# Altium PCB efm32.PcbDoc
Units mil, origin at the board's own origin, x right, y up, seen from the top; angles counter-clockwise.
Board outline 1082.68 x 1574.8 mil, 2 copper layers (Top Layer, Bottom Layer); 36 components, 29 nets, 211 pads, 56 vias.
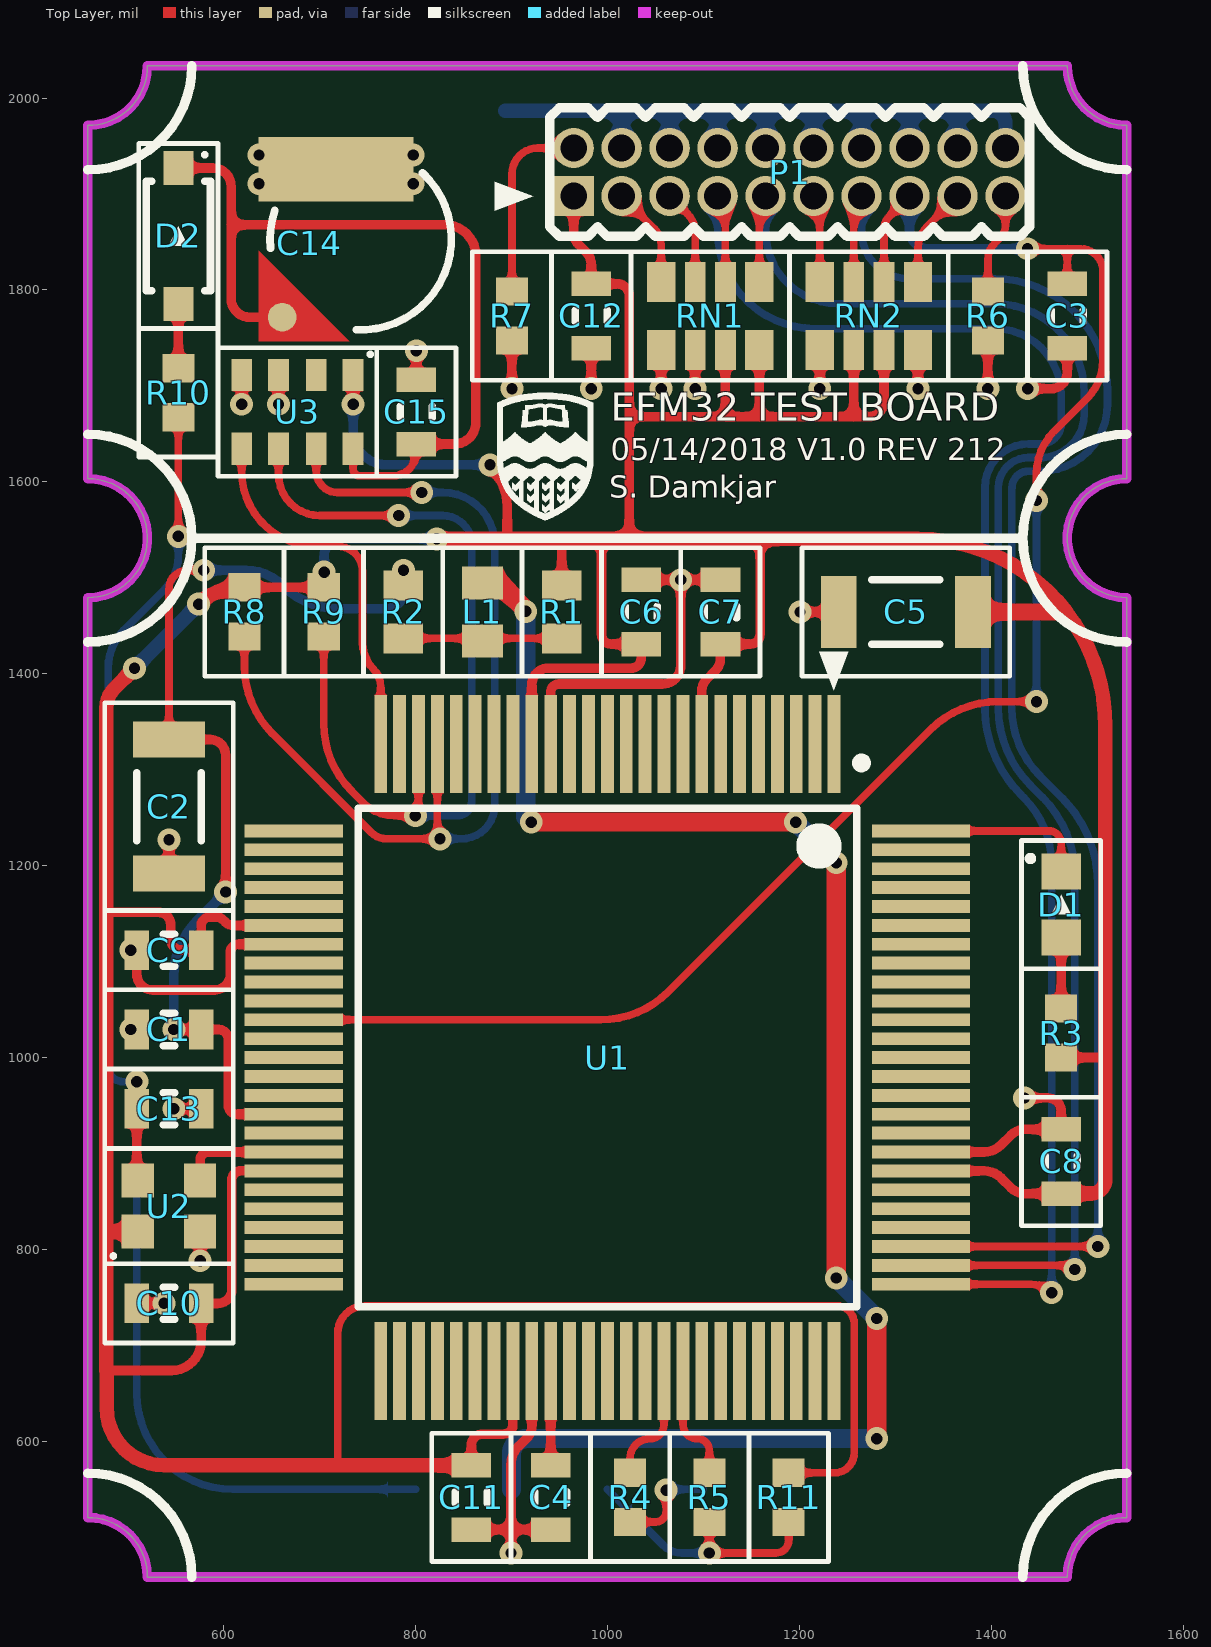
[diagram p0: Top Layer view]
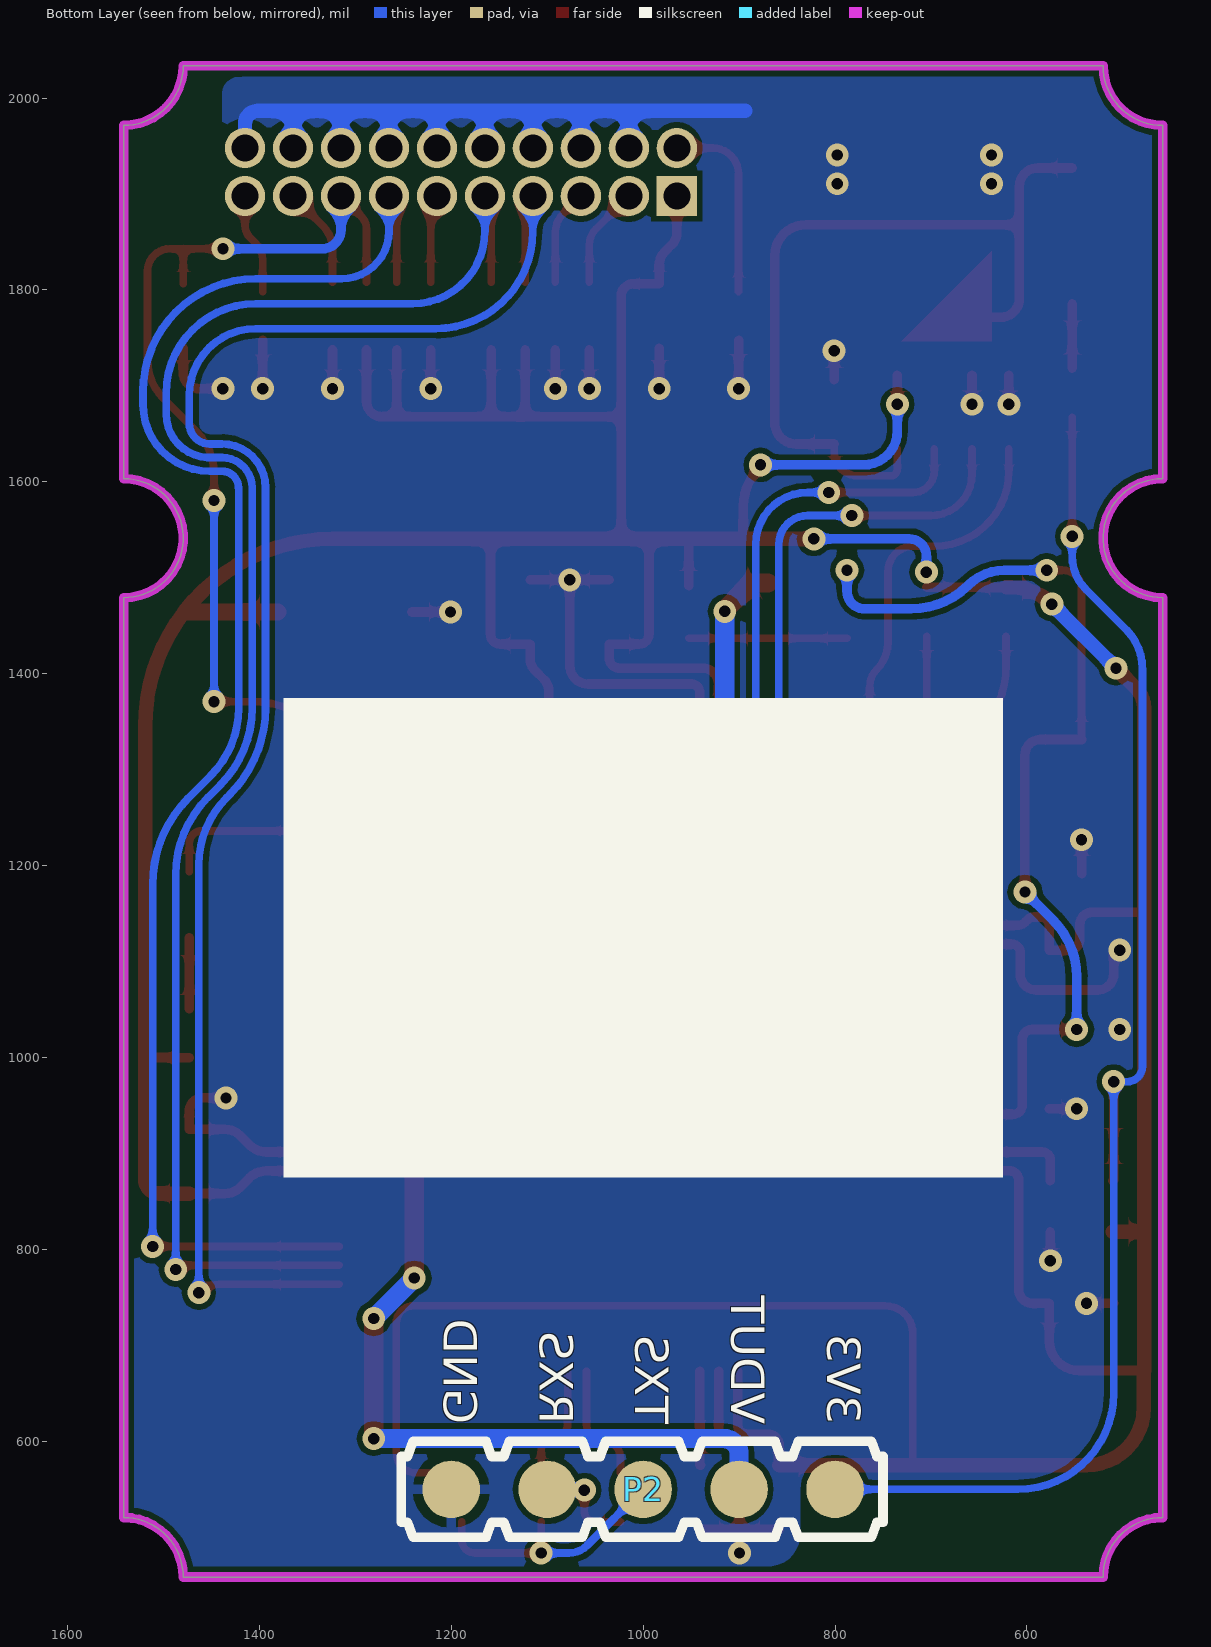
[diagram p1: Bottom Layer view, seen from below]

## Layer stack, top to bottom
Top Solder: solder mask 0.4, Solder Resist, Dk 3.5
Top Layer: signal copper 1.4
Dielectric 1: dielectric 12.6, FR-4, Dk 4.8
Bottom Layer: signal copper 1.4
Bottom Solder: solder mask 0.4, Solder Resist, Dk 3.5

## Board outline
458.66,520.67 458.66,1479.33 ccw(c458.66,1541.34) 458.66,1603.35 458.66,1971.46 ccw(c458.66,2033.46) 520.67,2033.46 1479.33,2033.46 ccw(c1541.34,2033.46) 1541.34,1971.46 1541.34,1603.35 ccw(c1541.34,1541.34) 1541.34,1479.33 1541.34,520.67 ccw(c1541.34,458.66) 1479.33,458.66 520.67,458.66 ccw(c458.66,458.66)

## Design rules (kind name [scope] priority, off if disabled: settings)
AcuteAngle [All] p1: minimum=6.00000000000000E+0001 checktracksonly=FALSE
BoardOutlineClearance [All] p1: gap=7.87 ignorepadtopadclearanceinfootprint=FALSE
Clearance [All] p1: gap=6 ignorepadtopadclearanceinfootprint=FALSE except(0: Arc-Hole Track-Hole SMDPad-Hole THPad-Hole Via-Hole Fill-Hole Poly-Hole Region-Hole Text-Hole)
Clearance ClearanceTop [OnLayer('Component Side')] p2 off: gap=4 ignorepadtopadclearanceinfootprint=FALSE except(0: Arc-Hole Track-Hole SMDPad-Hole THPad-Hole Via-Hole Fill-Hole Poly-Hole Region-Hole Text-Hole)
Clearance ClearanceTop_1 [OnLayer('Signal Layer 1')] p3 off: gap=4 ignorepadtopadclearanceinfootprint=FALSE except(0: Arc-Hole Track-Hole SMDPad-Hole THPad-Hole Via-Hole Fill-Hole Poly-Hole Region-Hole Text-Hole)
Clearance ClearanceTop_2 [OnLayer('Signal Layer 2')] p4 off: gap=4 ignorepadtopadclearanceinfootprint=FALSE except(0: Arc-Hole Track-Hole SMDPad-Hole THPad-Hole Via-Hole Fill-Hole Poly-Hole Region-Hole Text-Hole)
Clearance ClearanceBottom [OnLayer('Solder Side')] p5 off: gap=4 ignorepadtopadclearanceinfootprint=FALSE except(0: Arc-Hole Track-Hole SMDPad-Hole THPad-Hole Via-Hole Fill-Hole Poly-Hole Region-Hole Text-Hole)
Height HeightTop [OnLayer('Component Side')] p1: minheight=0 maxheight=1000 prefheight=157.48
Height HeightBottom [OnLayer('Solder Side')] p2: minheight=0 maxheight=157.48 prefheight=157.48
HoleSize [All] p1: absolutevalues=TRUE maxlimit=255.91 minlimit=7.87 maxpercent=80.000 minpercent=20.000
MinimumAnnularRing [All] p1: minimumring=4
MinimumSolderMaskSliver [All] p1: minsoldermaskwidth=3.94
PolygonConnect PolygonConnect_1 [IsVia] p1: connectstyle=Direct reliefconductorwidth=10 reliefentries=4 polygonreliefangle="90 Angle" airgapwidth=10
PolygonConnect [All] p2: connectstyle=Relief reliefconductorwidth=10 reliefentries=4 polygonreliefangle="90 Angle" airgapwidth=10
RoutingVias [All] p1: holewidth=8 width=20 viastyle="Through Hole" minholewidth=11.81 minwidth=23.81 maxholewidth=28 maxwidth=50
SMDEntry [All] p1: side=TRUE corner=FALSE anyangle=FALSE
SMDNeckDown [All] p1: percent=90.000
SMDToCorner [All] p1: distance=0
SMDToPlane [All] p1: distance=0
SilkToSilkClearance [All] p1: silktosilkclearance=6
SilkToSolderMaskClearance [IsPad] p1: minsilkscreentomaskgap=5.12 clearancetoexposedcopper=TRUE
SolderMaskExpansion [All] p1: expansion=0
UnConnectedPin [All] p1:
Width [All] p1: maxlimit=100 minlimit=6 preferedwidth=10 checkconnectedcopper=TRUE
25 further rules are at their usual default settings.

## Components (designator, comment, footprint, x,y, rotation, side; value= is the part's Value field where it differs from the comment)
C1 "Cap" TDK-CGA3E 543.1,1029.28 r0 top value=10000pF
C2 "Cap" TDK-CGA5L 543.1,1261.56 r90 top value=10µF
C3 "Cap" TDK-CGA3E 1479.28,1772.87 r270 top value=0.1µF
C4 "Cap" TDK-CGA3E 940.95,541.6 r90 top value=1µF
C5 "Cap" TDK-CGA5L 1311,1464.41 r0 top value=10µF
C6 "Cap" TDK-CGA3E 1035.16,1464.41 r270 top value=0.1µF
C7 "Cap" TDK-CGA3E 1117.84,1464.41 r270 top value=0.1µF
C8 "Cap" TDK-CGA3E 1472.93,891.73 r270 top value=0.1µF
C9 "Cap" TDK-CGA3E 543.1,1111.95 r0 top value=0.1µF
C10 "Cap" TDK-CGA3E 543.1,743.84 r0 top value=0.1µF
C11 "Cap" TDK-CGA3E 858.27,541.6 r90 top value=0.1µF
C12 "Cap" TDK-CGA3E 983.21,1772.87 r270 top value=0.1µF
C13 "Cap" TDK-CGA3E 543.1,946.6 r180 top value=10000pF
C14 "XH414HG" SKI-XH414HG-IV01E 742.93,1852.87 r180 top value=80mF
C15 "Cap" TDK-CGA3E 800.96,1672.87 r270 top value=0.1µF
D1 "LED" WL-150060XS75000 1472.93,1159.45 r90 top value=BLUE
D2 "1N4148W" DIOD-SOD123 552.93,1856.26 r90 top
L1 "Inductor" TDK-MPX1608 869.81,1464.41 r90 top value="1 kOhm @ 100MHz"
P1 "Header 10x2" SLN-GRPB102 964.9,1897.87 r0 top
P2 "319-10-105-30-054000" 319-10-105-30-054000 800,550 r0 bottom
R1 "Res3" VSH-0603MCT 952.48,1464.41 r90 top value=1
R2 "Res3" VSH-0603MCT 787.13,1464.41 r270 top value=1
R3 "Res3" PANA-ERJ3EK 1472.93,1025.59 r270 top value=10k
R4 "Res3" PANA-ERJ3EK 1023.62,541.6 r90 top value=33
R5 "Res3" PANA-ERJ3EK 1106.3,541.6 r90 top value=33
R6 "Res3" PANA-ERJ3EK 1396.6,1772.87 r270 top value=1k
R7 "Res3" PANA-ERJ3EK 900.53,1772.87 r90 top value=10k
R8 "Res3" PANA-ERJ3EK 621.77,1464.41 r90 top value=1k
R9 "Res3" PANA-ERJ3EK 704.45,1464.41 r90 top value=1k
R10 "Res3" PANA-ERJ3EK 552.93,1692.87 r270 top value=49.9
R11 "Res3" PANA-ERJ3EK 1188.98,541.6 r90 top value=1k
RN1 "Res4 Pack1" PANA-EXB1206 1107.23,1772.87 r270 top value=1k
RN2 "Res4 Pack1" PANA-EXB1206 1272.58,1772.87 r270 top value=1k
U1 "EFM32GG11B8" SI-TQFP100 1000,1000 r270 top
U2 "ASDMB" ABR-ASDMB 543.1,845.18 r90 top value=48MHz
U3 "RTCMK" ABR-RTCMK 676.94,1672.87 r270 top value=32.768kHz

## Footprints (in the part's own frame and the unit in brackets; to place one, negate y for a bottom-side part, rotate by r counter-clockwise, add the part's x,y. Pads: shape width x height; smd on the part's side, far side on the other; paste and mask are expansions set on the pad)
319-10-105-30-054000 [mil]
  round 60 smd: 1(0,0) 2(100,0) 3(200,0) 4(300,0) 5(400,0)
  silkscreen extent -50,-50 452,50, body extent -50,-50 450,50, height 87
ABR-ASDMB [mm] "DFN, 4-Leads, Body 2.00x2.50mm, Pitch 1.65mm, IPC Low Density"
  rect 0.9x0.85 smd: 1(-0.675,0.825) 2(-0.675,-0.825) 3(0.675,-0.825) 4(0.675,0.825)
  silkscreen extent -1.52,-1.7 1.53,1.7, body extent -1,-1.25 1,1.25, height 0.86
ABR-RTCMK [mm]
  rect 0.85x0.55 smd: 1(-0.975,1.475) 2(-0.975,0.5) 3(-0.975,-0.5) 4(-0.975,-1.475) 5(0.975,-1.475) 6(0.975,-0.5) 7(0.975,0.5) 8(0.975,1.475)
  silkscreen extent -1.7,-2.1 1.7,2.1, body extent -1.25,-1.6 1.25,1.6, height 1
DIOD-SOD123 [mm] "SODFL, 2-Leads, Body 1.55x3.70mm, IPC Low Density"
  rect 0.9x0.8 smd: 1(-1.8,0) 2(1.8,0)
  silkscreen extent -2.45,-1.05 2.45,1.05, body extent -1.85,-0.85 1.85,0.85, height 1.45
PANA-ERJ3EK [mm] "Chip Resistor, 2-Leads, Body 1.60x0.85mm, IPC High Density"
  rect 0.75x0.85 smd: 1(-0.65,0) 2(0.65,0)
  silkscreen extent -1.7,-1.05 1.7,1.05, body extent -0.88,-0.48 0.87,0.48, height 0.55
PANA-EXB1206 [mm] "Chip Array, ConvexS, 8-Leads, Pitch 0.80mm,  Body 3.20x1.60mm,  IPC Low Density"
  rect 1.05x0.75 smd: 1(-0.9,1.3) 4(-0.9,-1.3) 5(0.9,-1.3) 8(0.9,1.3)
  rect 1.05x0.55 smd: 2(-0.9,0.4) 3(-0.9,-0.4) 6(0.9,-0.4) 7(0.9,0.4)
  silkscreen extent -1.7,-2.1 1.7,2.1, body extent -0.92,-1.7 0.92,1.7, height 0.6
SI-TQFP100 [mm] "TSQFP, 100-Leads, Body 14.00x14.00mm, Pitch 0.50mm, IPC Low Density"
  rect 2.6x0.34 smd: 1(-8.3,6) 2(-8.3,5.5) 3(-8.3,5) 4(-8.3,4.5) 5(-8.3,4) 6(-8.3,3.5) 7(-8.3,3) 8(-8.3,2.5) 9(-8.3,2) 10(-8.3,1.5) 11(-8.3,1) 12(-8.3,0.5) 13(-8.3,0) 14(-8.3,-0.5) 15(-8.3,-1) 16(-8.3,-1.5) 17(-8.3,-2) 18(-8.3,-2.5) 19(-8.3,-3) 20(-8.3,-3.5) 21(-8.3,-4) 22(-8.3,-4.5) 23(-8.3,-5) 24(-8.3,-5.5) 25(-8.3,-6) 51(8.3,-6) 52(8.3,-5.5) 53(8.3,-5) 54(8.3,-4.5) 55(8.3,-4) 56(8.3,-3.5) 57(8.3,-3) 58(8.3,-2.5) 59(8.3,-2) 60(8.3,-1.5) 61(8.3,-1) 62(8.3,-0.5) 63(8.3,0) 64(8.3,0.5) 65(8.3,1) 66(8.3,1.5) 67(8.3,2) 68(8.3,2.5) 69(8.3,3) 70(8.3,3.5) 71(8.3,4) 72(8.3,4.5) 73(8.3,5) 74(8.3,5.5) 75(8.3,6)
  rect 0.34x2.6 smd: 26(-6,-8.3) 27(-5.5,-8.3) 28(-5,-8.3) 29(-4.5,-8.3) 30(-4,-8.3) 31(-3.5,-8.3) 32(-3,-8.3) 33(-2.5,-8.3) 34(-2,-8.3) 35(-1.5,-8.3) 36(-1,-8.3) 37(-0.5,-8.3) 38(0,-8.3) 39(0.5,-8.3) 40(1,-8.3) 41(1.5,-8.3) 42(2,-8.3) 43(2.5,-8.3) 44(3,-8.3) 45(3.5,-8.3) 46(4,-8.3) 47(4.5,-8.3) 48(5,-8.3) 49(5.5,-8.3) 50(6,-8.3) 76(6,8.3) 77(5.5,8.3) 78(5,8.3) 79(4.5,8.3) 80(4,8.3) 81(3.5,8.3) 82(3,8.3) 83(2.5,8.3) 84(2,8.3) 85(1.5,8.3) 86(1,8.3) 87(0.5,8.3) 88(0,8.3) 89(-0.5,8.3) 90(-1,8.3) 91(-1.5,8.3) 92(-2,8.3) 93(-2.5,8.3) 94(-3,8.3) 95(-3.5,8.3) 96(-4,8.3) 97(-4.5,8.3) 98(-5,8.3) 99(-5.5,8.3) 100(-6,8.3)
  silkscreen extent -10.75,-6.6 6.6,6.85, body extent -8,-8 8,8, height 1.2
SKI-XH414HG-IV01E [mm]
  round 0.762 smd: 1(2.078,2.065)
  rect 4.1x1.7 smd: 2(0.65,-1.85)
  Top Layer region: 2.7,0.3 0.3,2.7 2.7,2.7
  silkscreen extent -2.4,-1.75 2.4,2.4, body extent -2.4,-2.4 2.4,2.4, height 1.62
SLN-GRPB102 [mil]
  rect 42x42 hole 28: 1(0,0)
  round 42 hole 28: 2(0,50) 3(50,0) 4(50,50) 5(100,0) 6(100,50) 7(150,0) 8(150,50) 9(200,0) 10(200,50) 11(250,0) 12(250,50) 13(300,0) 14(300,50) 15(350,0) 16(350,50) 17(400,0) 18(400,50) 19(450,0) 20(450,50)
  silkscreen extent -25,-42 475,92, body extent -25,-42 475,92, height 130
TDK-CGA3E [mm] "Chip Capacitor, 2-Leads, Body 1.60x0.80mm, IPC Low Density"
  rect 0.65x1.05 smd: 1(-0.85,0) 2(0.85,0)
  silkscreen extent -1.7,-1.05 1.7,1.05, body extent -0.85,-0.45 0.85,0.45, height 0.8
TDK-CGA5L [mm] "Chip Capacitor, 2-Leads, Body 3.20x1.60mm, IPC Low Density"
  rect 0.95x1.9 smd: 1(-1.775,0) 2(1.775,0)
  silkscreen extent -2.75,-1.7 2.75,1.7, body extent -1.7,-0.9 1.7,0.9, height 1.6
TDK-MPX1608 [mm] "Chip Inductor, 2-Leads, Body 1.60x0.80mm, IPC Low Density"
  rect 0.87x1.08 smd: 1(-0.765,0) 2(0.765,0)
  silkscreen extent -1.7,-1.05 1.7,1.05, body extent -0.87,-0.48 0.87,0.47, height 0.75
VSH-0603MCT [mm] "Chip Resistor, 2-Leads, Body 1.55x0.85mm, IPC Low Density"
  rect 0.8x1.05 smd: 1(-0.7,0) 2(0.7,0)
  silkscreen extent -1.7,-1.05 1.7,1.05, body extent -0.8,-0.48 0.8,0.48, height 0.55
WL-150060XS75000 [mm] "Chip Diode, 2-Leads, Body 1.60x0.80mm, IPC Low Density"
  rect 0.95x1.05 smd: 1(-0.875,0) 2(0.875,0)
  silkscreen extent -1.7,-1.05 1.7,1.05, body extent -0.8,-0.4 0.8,0.4, height 0.7

## Part data
C1 C13: library part PC-TDK-01883, "CAP CER 10000PF 100V C0G 0603", Manufacturer Part Number=CGA3E1C0G2A103J080AC, Supplier Part Number 1=445-172688-1-ND, Temperature Coefficient=NP0, Tolerance=±5%, Voltage - Rated=100V, Applications=Automotive, Index=1883, LatestRevisionDate=3/16/2016, LatestRevisionNote=..., PackageDescription="Radial Cap, Thru-Hole; 2 Leads; 0.3 in Pin Spacing", PackageReference="0603 (1608 Metric)", Part Number=PC-TDK-01883, Published=3/16/2016, Publisher=AlbertaSat, Supplier 1=Digi-key, Supplier Link=http://www.digikey.ca/product-search/en?keywords=445-172688-1-ND
C2 C5: library part PC-TDK-02917, "CAP CER 10UF 25V X7R 1206", Manufacturer Part Number=CGA5L1X7R1E106K160AC, Supplier Part Number 1=445-6990-1-ND, Temperature Coefficient=X7R, Tolerance=±10%, Voltage - Rated=25V, Applications=Automotive, Index=2917, LatestRevisionDate=3/16/2016, LatestRevisionNote=..., PackageDescription="Radial Cap, Thru-Hole; 2 Leads; 0.3 in Pin Spacing", PackageReference="1206 (3216 Metric)", Part Number=PC-TDK-02917, Published=3/16/2016, Publisher=AlbertaSat, Supplier 1=Digi-key, Supplier Link=http://www.digikey.ca/product-search/en?keywords=445-6990-1-ND
C3 C6 C7 C8 C9 C10 C11 C12 C15: library part PC-TDK-02272, "CAP CER 0.1UF 50V X8R 0603", Manufacturer Part Number=CGA3E3X8R1H104K080AB, Supplier Part Number 1=445-12606-1-ND, Temperature Coefficient=X8R, Tolerance=±10%, Voltage - Rated=50V, Applications=Automotive, Index=2272, LatestRevisionDate=3/16/2016, LatestRevisionNote=..., PackageDescription="Radial Cap, Thru-Hole; 2 Leads; 0.3 in Pin Spacing", PackageReference="0603 (1608 Metric)", Part Number=PC-TDK-02272, Published=3/16/2016, Publisher=AlbertaSat, Supplier 1=Digi-key, Supplier Link=http://www.digikey.ca/product-search/en?keywords=445-12606-1-ND
C4: library part PC-TDK-02603, "CAP CER 1UF 25V X7R 0603", Manufacturer Part Number=CGA3E1X7R1E105K080AC, Supplier Part Number 1=445-6931-1-ND, Temperature Coefficient=X7R, Tolerance=±10%, Voltage - Rated=25V, Applications=Automotive, Index=2603, LatestRevisionDate=3/16/2016, LatestRevisionNote=..., PackageDescription="Radial Cap, Thru-Hole; 2 Leads; 0.3 in Pin Spacing", PackageReference="0603 (1608 Metric)", Part Number=PC-TDK-02603, Published=3/16/2016, Publisher=AlbertaSat, Supplier 1=Digi-key, Supplier Link=http://www.digikey.ca/product-search/en?keywords=445-6931-1-ND
C14: library part PC-SKI-00001, "CAP 80MF 3.3V SURFACE MOUNT", Manufacturer Part Number=XH414HG-IV01E, Supplier Part Number 1=728-1050-1-ND, Voltage - Rated=3.3V, Index=1, LatestRevisionDate=2018-04-25, LatestRevisionNote=..., PackageDescription="Polarized Capacitor (Radial); 2 Leads", PackageReference="0.189\" Dia (4.80mm)", Part Number=PC-SKI-00001, Published=2018-04-25, Publisher=AlbertaSat, Supplier 1=Digi-key, Supplier 2=Mouser, Supplier Link=#https://www.digikey.ca/product-detail/en/seiko-instruments/XH414HG-IV01E/728-1050-1-ND/1889211#, Supplier Part Number 2=628-XH414HG-IV01E
D1: library part 4, "LED BLUE CLEAR 0603 SMD", Manufacturer Part Number=150060BS75000, Supplier Part Number 1=732-4966-1-ND, Brightness=145mcd, LatestRevisionDate=08-Jul-2005, LatestRevisionNote="Mech Layer 1 removed.", PackageDescription="LED; 2 Leads", PackageReference=WL-150060XS75000, Part Number=4, Published=8-Jun-2000, Publisher="Altium Limited", Supplier 1=Digi-Key, Supplier Link=http://www.digikey.ca/product-search/en?keywords=732-4966-1-ND
D2: library part 26, "DIODE GEN PURP 100V 300MA SOD123", Current - Peak Pulse=300mA, Manufacturer Part Number=1N4148W-7-F, Supplier Part Number 1=1N4148W-FDICT-ND, Voltage - DC Reverse="1.25V @ 150mA", Voltage - Reverse Standoff (Typ)=100V, Code_JEDEC=DO-214-AB, LatestRevisionDate=17-Jul-2002, LatestRevisionNote="Re-released for DXP Platform.", PackageDescription="DO-214-AB/SMC; 2 C-Bend Leads; Body 7.9 x 5.9 mm, inc. leads (LxW)", PackageReference=DIOD-SOD123, PackageVersion=Sep-1996, Part Number=26, Published=8-Jun-2000, Publisher="Altium Limited", Supplier 1=Digi-Key, Supplier Link=#https://www.digikey.ca/product-detail/en/diodes-incorporated/1N4148W-7-F/1N4148W-FDICT-ND/815280#
L1: library part PL-TDK-02954, "FERRITE BEAD 1 KOHM 0603 1LN", Current - Rated=800mA, Manufacturer Part Number=MPZ1608S102ATD25, Supplier Part Number 1=445-172890-1-ND, Applications=Automotive, Code_IEC=1608, Code_JEITA=0603, Index=2954, LatestRevisionDate=7/8/2017, LatestRevisionNote=..., PackageDescription="Chip Inductor, 2-Leads, Body 1.60x0.80mm, IPC Low Density", PackageReference="0603 (1608 Metric)", Part Number=PL-TDK-02954, Published=7/8/2017, Publisher=AlbertaSat, Supplier 1=Digi-key, Supplier 2=Mouser, Supplier Link=#https://www.digikey.ca/product-detail/en/tdk-corporation/MPZ1608S102ATD25/445-172890-1-ND/5040521#, Supplier Part Number 2=810-MPZ1608S102ATD25
P1: library part PP-SLN-00022, "CONN HEADER .050\"\" 20PS DL PCB AU", Manufacturer Part Number=GRPB102VWVN-RC, Supplier Part Number 1=S9015E-10-ND, Index=22, LatestRevisionDate=3/16/2016, LatestRevisionNote=..., Number of Positions=20, Number of Rows=2, PackageDescription="CONN HEADER .050\"\" 20PS DL PCB AU", PackageReference=SLN-GRPB102, Part Number=PP-SLN-00022, Published=3/16/2016, Publisher=AlbertaSat, Supplier 1=Digi-key, Supplier Link=http://www.digikey.ca/product-search/en?keywords=S9015E-10-ND
P2: library part PP-MMM-00002, "LOW PROFILE SLC TARGET CONNECTOR", Supplier Part Number 1=ED10781-ND, Index=2, LatestRevisionDate=2018-05-10, LatestRevisionNote=..., Manufacturer Part Number=319-10-105-30-054000, Part Number=PP-MMM-00002, Published=2018-05-10, Publisher=AlbertaSat, Supplier 1=Digi-key, Supplier 2=Mouser, Supplier Link=#https://www.digikey.ca/product-detail/en/mill-max-manufacturing-corp/319-10-105-30-054000/ED10781-ND/6243896#, Supplier Part Number 2=575-3191010530054000
R1 R2: library part PR-VSH-00048, "RES SMD 1 OHM 1% 1/8W 0603", Manufacturer Part Number=MCT06030C1008FP500, Power - Rated=1/8W, Supplier Part Number 1=MCT0603-1.00-CFCT-ND, Temperature Coefficient=±50ppm/°C, Tolerance=±1%, Applications="General Purpose", Index=4, LatestRevisionDate=3/14/2016, LatestRevisionNote=..., PackageDescription="Chip Resistor, 2-Leads, Body 1.55x0.85mm, IPC Low Density", PackageReference="0603 (1608 Metric)", Part Number=PR-VSH-00048, Published=3/14/2016, Publisher=AlbertaSat, Supplier 1=Digi-key, Supplier Link=http://www.digikey.ca/product-search/en?keywords=MCT0603-1.00-CFCT-ND
R3 R7: library part 17203, "RES SMD 10K OHM 1% 1/10W 0603", Manufacturer Part Number=ERJ-3EKF1002V, Power="0.1W, 1/10W", Supplier Part Number 1=P10.0KHCT-ND, Temperature Coefficient=±100ppm/°C, Tolerance=±1%, LatestRevisionDate=29-May-2009, LatestRevisionNote="IPC-7351 Footprint Added.", PackageDescription="Chip Resistor, 2-Leads, Body 1.60x0.80mm, IPC Low Density", PackageReference="0603 (1608 Metric)", Part Number=17203, Published=8-Jun-2000, Publisher="Altium Limited", Supplier 1=Digi-Key, Supplier Link=http://www.digikey.ca/product-search/en?keywords=P10.0KHCT-ND
R4 R5: library part 13588, "RES SMD 33 OHM 1% 1/10W 0603", Manufacturer Part Number=ERJ-3EKF33R0V, Power="0.1W, 1/10W", Supplier Part Number 1=P33.0HCT-ND, Temperature Coefficient=±100ppm/°C, Tolerance=±1%, LatestRevisionDate=29-May-2009, LatestRevisionNote="IPC-7351 Footprint Added.", PackageDescription="Chip Resistor, 2-Leads, Body 1.60x0.80mm, IPC Low Density", PackageReference="0603 (1608 Metric)", Part Number=13588, Published=8-Jun-2000, Publisher="Altium Limited", Supplier 1=Digi-Key, Supplier Link=http://www.digikey.ca/product-search/en?keywords=P33.0HCT-ND
R6 R8 R9 R11: library part 15398, "RES SMD 1K OHM 1% 1/10W 0603", Manufacturer Part Number=ERJ-3EKF1001V, Power="0.1W, 1/10W", Supplier Part Number 1=P1.00KHCT-ND, Temperature Coefficient=±100ppm/°C, Tolerance=±1%, LatestRevisionDate=29-May-2009, LatestRevisionNote="IPC-7351 Footprint Added.", PackageDescription="Chip Resistor, 2-Leads, Body 1.60x0.80mm, IPC Low Density", PackageReference="0603 (1608 Metric)", Part Number=15398, Published=8-Jun-2000, Publisher="Altium Limited", Supplier 1=Digi-Key, Supplier Link=http://www.digikey.ca/product-search/en?keywords=P1.00KHCT-ND
R10: library part 13734, "RES SMD 49.9 OHM 1% 1/10W 0603", Manufacturer Part Number=ERJ-3EKF49R9V, Power="0.1W, 1/10W", Supplier Part Number 1=P49.9HCT-ND, Temperature Coefficient=±100ppm/°C, Tolerance=±1%, LatestRevisionDate=29-May-2009, LatestRevisionNote="IPC-7351 Footprint Added.", PackageDescription="Chip Resistor, 2-Leads, Body 1.60x0.80mm, IPC Low Density", PackageReference="0603 (1608 Metric)", Part Number=13734, Published=8-Jun-2000, Publisher="Altium Limited", Supplier 1=Digi-Key, Supplier Link=http://www.digikey.ca/product-search/en?keywords=P49.9HCT-ND
RN1 RN2: library part 19830, "RES ARRAY 4 RES 1K OHM 1206", Manufacturer Part Number=EXB-38V102JV, Power=62.5mW, Supplier Part Number 1=Y9102CT-ND, Temperature Coefficient=±200ppm/°C, Tolerance=±5%, Code_JEDEC=MS-012-AC, PackageDescription="Chip Array, ConvexS, 8-Leads, Pitch 0.80mm,  Body 3.20x1.60mm,  IPC Low Density", PackageReference="1206 (3216 Metric), Convex, Long Side Terminals", Part Number=19830, Sim Note="Enter the Resistance value into parameter field.", Supplier 1=Digi-Key, Supplier Link=http://www.digikey.ca/product-search/en?keywords=Y9102CT-ND
U1: library part PU-SI-00008, "GIANT GECKO 11 ULTRA LOW POWER M", Manufacturer Part Number=EFM32GG11B820F2048GQ100-A, Operating Temperature="-40°C ~ 85°C (TA)", Supplier Part Number 1=336-4515-ND, Applications="General Purpose", Core Processor="ARM Cortex-M4", Core Size=32-Bit, Index=8, LatestRevisionDate=4/18/2018, LatestRevisionNote=..., PackageDescription="TSQFP, 100-Leads, Body 14.00x14.00mm, Pitch 0.50mm, IPC Low Density", PackageReference=SI-TQFP100, Part Number=PU-SI-00008, Program Memory Size="2MB (2M x 8)", Published=4/18/2018, Publisher=AlbertaSat, RAM Size="512K x 8", Speed=72MHz, Supplier 1=Digi-key, Supplier 2=Mouser, Supplier Link=https://www.digikey.ca/products/en?keywords=336-4515-ND, Supplier Part Number 2=634-11820F2048GQ100
U2: library part PU-ABR-00029, "OSC MEMS 48.000MHZ CMOS SMD", Manufacturer Part Number=ASDMB-48.000MHZ-XY-T, Supplier Part Number 1=535-11144-1-ND, Tolerance=±10ppm, Index=29, LatestRevisionDate=10/24/2017, LatestRevisionNote=..., PackageDescription="DFN, 4-Leads, Body 2.00x2.50mm, Pitch 1.65mm, IPC Low Density", PackageReference="4-SMD, No Lead", Part Number=PU-ABR-00029, Published=10/24/2017, Publisher=AlbertaSat, Supplier 1=Digi-key, Supplier 2=Mouser, Supplier Link=http://www.digikey.ca/product-search/en?keywords=535-11144-1-ND, Supplier Part Number 2=815-ASDMB-48-XY-T
U3: library part PU-ABR-00037, "IC RTC CLK/CALENDAR I2C 8-SMT", Manufacturer Part Number=AB-RTCMK-32.768KHZ-T3, Supplier Part Number 1=535-11916-1-ND, Index=37, LatestRevisionDate=4/23/2018, LatestRevisionNote=..., PackageDescription="8-SMD Module", PackageReference="8-SMD Module", Part Number=PU-ABR-00037, Published=4/23/2018, Publisher=AlbertaSat, Supplier 1=Digi-key, Supplier 2=Mouser, Supplier Link=https://www.digikey.ca/product-detail/en/abracon-llc/AB-RTCMK-32.768KHZ-T3/535-11916-1-ND/3601050, Supplier Part Number 2=815-AB-RTCMK-32.7KT3

## Via types
v1: diameter 23.81, hole 11.81, Top Layer to Bottom Layer, tented both sides, 56 vias

## Nets (pads, with @x,y where several pads share a name; then routed paths per layer and width w, separated by ;. In a path a pad name is that pad's centre, name@x,y a point inside that pad or via, vN(x,y) a via of type N, cw(c..) or ccw(c..) an arc to the next point about the centre after c; other vN are vias at no path point)
3V3: C13.2 P2.1 R10.2 U2.4 | length 1592.9
  Top Layer w8: v1(552.93,1543.21) R10.2
  Top Layer w10: v1(509.64,974.96) C13.2 ; U2.4@509.64,872.74 ccw(c510.62,872.74) U2.4@510.26,871.83 ; U2.4@509.64,872.74 ccw(c510.62,872.74) U2.4@510.26,871.83 ; U2.4@509.64,872.74 C13.2 ; U2.4@509.64,872.74 C13.2 ; U2.4@510.26,871.83 ccw(c510.62,872.74) U2.4 cw(c510.62,872.74) U2.4@510.26,871.83
  Bottom Layer w8: v1(552.93,1543.21) 552.93,1522.67 cw(c503.75,1522.67) 538.52,1487.89 496.42,1445.79 ccw(c536.85,1405.36) 479.67,1405.36 479.67,990.61 ccw(c495.32,990.61) 495.32,974.96 v1(509.64,974.96) 509.64,650 ccw(c609.64,650) 609.64,550 P2.1
#RESET1: C3.1 P1.15 RN2.2 U1.36 | length 1772.6
  Top Layer w8: U1.36 992.83,1039.37 ccw(c992.83,1139.37) 1063.54,1068.66 1336.59,1341.71 cw(c1407.3,1271) 1407.3,1371 v1(1447.18,1371) ; RN2.2 1288.33,1863.54 cw(c1307.06,1863.54) 1293.82,1876.79 P1.15 ; v1(1437.93,1842.87) 1479.27,1842.87 ; v1(1447.18,1580.55) 1447.18,1608 cw(c1510.69,1608) 1465.78,1652.91 1500.09,1687.21 ccw(c1460.51,1726.79) 1516.48,1726.79 1516.48,1819.63 ccw(c1493.23,1819.63) 1493.23,1842.87 1479.27,1842.87 ; C3.1 1479.27,1842.87
  Bottom Layer w8: v1(1447.18,1371) v1(1447.18,1580.55)
  Bottom Layer w10: P1.15 1314.9,1862.61 ccw(c1334.64,1862.61) 1334.64,1842.87 v1(1437.93,1842.87)
BLINKY1: D1.2 U1.100 | length 183
  Top Layer w8: U1.100 1460.14,1236.22 cw(c1460.14,1223.43) 1472.93,1223.43 D1.2
DBG_SWCLK1: P1.7 RN1.2 U1.76 | length 1743.8
  Top Layer w8: P1.7 1122.98,1897.87 RN1.2 ; U1.76@1316.77,763.78 1441.81,763.78 cw(c1441.81,733.77) v1(1463.04,754.99)
  Bottom Layer w8: P1.7 1114.9,1861.16 ccw(c1216.35,1861.16) 1216.35,1759.71 1403.56,1759.71 cw(c1403.56,1690.23) 1473.04,1690.23 1473.04,1660.96 cw(c1451.62,1660.96) 1451.62,1639.54 1439.07,1639.54 ccw(c1439.07,1593.97) 1393.51,1593.97 1393.51,1364.4 ccw(c1521.51,1364.4) 1431,1273.89 1434.33,1270.56 cw(c1365.02,1201.25) 1463.04,1201.25 v1(1463.04,754.99)
DBG_SWDIO1: P1.9 RN1.1 U1.77 | length 1725.9
  Top Layer w8: RN1.1 1158.41,1897.87 P1.9 ; U1.77@1316.77,783.47 1476.51,783.47 cw(c1476.51,768.46) v1(1487.12,779.07)
  Bottom Layer w8: P1.9 1164.9,1861.16 ccw(c1240.35,1861.16) 1240.35,1785.71 1403.56,1785.71 cw(c1403.56,1692.15) 1497.12,1692.15 1497.12,1670.76 cw(c1451.62,1670.76) 1454.03,1625.33 1438.86,1625.33 ccw(c1438.86,1593.97) 1407.51,1593.97 1407.51,1364.4 ccw(c1521.51,1364.4) 1440.9,1283.79 1453.73,1270.96 cw(c1373.12,1190.35) 1487.12,1190.35 v1(1487.12,779.07)
DBG_SWO1: P1.13 RN2.3 U1.78 | length 1660.9
  Top Layer w8: RN2.3 1256.83,1897.87 P1.13 ; U1.78@1316.77,803.15 v1(1511.2,803.15)
  Bottom Layer w8: P1.13 1264.9,1861.16 ccw(c1314.35,1861.16) 1314.35,1811.71 1403.56,1811.71 cw(c1403.56,1694.07) 1521.2,1694.07 1521.2,1680.63 cw(c1451.62,1680.63) 1451.62,1611.05 1438.86,1611.05 ccw(c1438.86,1593.97) 1421.78,1593.97 ; 1421.51,1593.97 1421.51,1364.4 ccw(c1521.51,1364.4) 1450.8,1293.69 1473.71,1270.78 cw(c1383.2,1180.27) 1511.2,1180.27 v1(1511.2,803.15)
GND: C1.1 C2.1 C3.2 C4.1 C5.1 C6.1 C7.1 C8.1 C9.1 C10.1 C11.1 C12.2 C13.1 C14.2 C15.1 P1.4 P1.6 P1.8 P1.10 P1.12 P1.14 P1.16 P1.18 P1.20 P2.5 R6.2 R7.1 RN1.5 RN1.6 RN2.5 RN2.8 U1.16 U1.32 U1.59 U1.83 U2.2 U3.3 U3.4 | length 2609.1
  Top Layer w10: C10.1 v1(538,743.84) ; C9.1 509.64,1086.87 ccw(c526.1,1086.87) 526.1,1070.41 590.52,1070.41 ccw(c590.52,1086.91) 607.02,1086.91 607.02,1109.74 cw(c615.39,1109.74) 615.39,1118.11 U1.32 ; C2.1 v1(543.1,1226.99) ; v1(548.21,946.6) C13.1 ; v1(575.58,788.29) U2.2 ; v1(618.87,1680.94) U3.4 ; v1(657.26,1680.94) U3.3 ; C15.1 v1(800.96,1736.65) ; C11.1 899.61,508.14 ; v1(899.61,483.66) 899.61,508.14 ; v1(900.53,1697.12) R7.1 ; 916.07,603.41 907.3,594.64 ccw(c925.88,576.06) 899.61,576.06 899.61,508.14 ; 916.08,603.42 ccw(c903.53,615.94) 921.26,615.94 U1.59 ; C4.1 899.61,508.14 ; U1.16 940.94,1380.9 cw(c949.34,1380.9) 949.34,1389.29 1057.17,1389.29 ccw(c1057.17,1408.62) 1076.5,1408.62 v1(1076.5,1497.87) ; v1(983.21,1697.12) C12.2 ; C6.1 v1(1076.5,1497.87) ; v1(1056.05,1697.12) RN1.5 ; v1(1091.48,1697.12) RN1.6 ; C7.1 v1(1076.5,1497.87) ; v1(1200.8,1464.41) C5.1 ; v1(1221.4,1697.12) RN2.5 ; v1(1323.76,1697.12) RN2.8 ; U1.83 1392.54,901.58 ccw(c1392.54,926.82) 1410.38,908.97 1420.37,918.95 cw(c1435.45,903.87) 1435.45,925.2 C8.1 1472.93,944.13 ccw(c1459.13,944.13) 1459.13,957.92 v1(1434.66,957.92) ; v1(1396.6,1697.12) R6.2 ; v1(1438.03,1697.12) 1462.5,1697.12 ccw(c1462.5,1713.9) 1479.27,1713.9 C3.2
  Bottom Layer w15: 893.42,1986.62 1014.9,1986.62 ; P1.4 1014.9,1986.62 ; P1.6 1064.9,1986.62 ; P1.8 1114.9,1986.62 ; P1.10 1164.9,1986.62 ; P1.12 1214.9,1986.62 ; P1.14 1264.9,1986.62 ; P1.16 1314.9,1986.62 ; P1.18 1364.9,1986.62 ; P1.20 1414.9,1973.18 ccw(c1401.46,1973.18) 1401.46,1986.62 1364.9,1986.62 ; 1014.9,1986.62 1064.9,1986.62 ; 1064.9,1986.62 1114.9,1986.62 ; 1114.9,1986.62 1164.9,1986.62 ; 1164.9,1986.62 1214.9,1986.62 ; 1214.9,1986.62 1264.9,1986.62 ; 1264.9,1986.62 1314.9,1986.62 ; 1314.9,1986.62 1364.9,1986.62
  other v1: 503.32,1029.28 503.32,1111.95 637.02,1910.71 797.65,1910.71 637.02,1940.71 797.65,1940.71
HFXIN1: U1.43 U2.3 | length 123.8
  Top Layer w10: U2.3 575.58,893.05 cw(c584.11,893.05) 584.11,901.58 U1.43
LFXIN1: U1.25 U3.5 | length 393.9
  Top Layer w8: U3.5 618.87,1611.02 ccw(c697.02,1611.02) 697.02,1532.87 718.6,1532.87 cw(c718.6,1506.61) 744.86,1506.61 744.86,1432.59 ccw(c784.71,1432.59) 756.53,1404.41 cw(c739.04,1386.92) 763.78,1386.92 U1.25
NetC4_2: C4.2 U1.60 | length 99.4
  Top Layer w10: C4.2@940.18,575.07 ccw(c940.18,575.83) C4.2@940.94,575.83 ; C4.2 U1.60
NetC14_1: C14.1 C15.2 D2.2 U3.8 | length 882.9
  Top Layer w8: U3.8 735.01,1613.36 ccw(c742.18,1613.36) 742.18,1606.2 776,1606.2 ccw(c776,1631.16) 800.96,1631.16 C15.2
  Top Layer w10: D2.2 588.68,1927.12 cw(c588.68,1907.87) 607.93,1907.87 607.93,1867.87 ; C14.1 627.16,1771.57 cw(c627.16,1790.81) 607.93,1790.81 607.93,1867.87 ; C15.2 840.58,1639.41 ccw(c840.58,1661.76) 862.93,1661.76 862.93,1835.62 ccw(c830.68,1835.62) 830.68,1867.87 607.93,1867.87
NetD1_1: D1.1 R3.1 | length 73.8
  Top Layer w10: R3.1 D1.1
NetD2_1: D2.1 R10.1 | length 66.9
  Top Layer w10: R10.1 D2.1
NetL1_1: L1.1 R1.1 R2.2 | length 165.4
  Top Layer w8: R2.2@787.13,1436.85 R1.1
NetP1_2: P1.2 R7.2 | length 202.2
  Top Layer w8: R7.2 900.53,1920.86 cw(c927.55,1920.86) 927.55,1947.87 P1.2
NetP1_3: P1.3 RN1.4 | length 105.6
  Top Layer w8: P1.3 1049.06,1863.71 cw(c1032.19,1846.84) 1056.05,1846.84 RN1.4
NetP1_5: P1.5 RN1.3 | length 99.4
  Top Layer w8: P1.5 1083.62,1879.15 cw(c1064.66,1860.18) 1091.48,1860.18 RN1.3
NetP1_11: P1.11 RN2.4 | length 96.1
  Top Layer w8: P1.11 1221.4,1897.87 RN2.4
NetP1_17: P1.17 RN2.1 | length 105.2
  Top Layer w8: RN2.1 1323.76,1842.9 cw(c1357.15,1842.9) 1333.54,1866.51 P1.17
NetP1_19: P1.19 R6.1 | length 105.2
  Top Layer w8: R6.1 1396.6,1832 cw(c1419.31,1832) 1403.25,1848.06 1409.48,1854.29 ccw(c1396.39,1867.38) 1414.9,1867.38 P1.19
NetP2_3: P2.3 R5.1 R11.1 | length 274.3
  Top Layer w8: R5.1 v1(1106.3,483.66) 1175.65,483.66 ccw(c1175.65,496.99) 1188.98,496.99 R11.1
  Bottom Layer w8: P2.3 1058.52,491.48 ccw(c1077.39,510.34) 1077.39,483.66 v1(1106.3,483.66)
NetP2_4: P2.4 R4.1 | length 105.3
  Top Layer w8: R4.1 1050.2,516.01 ccw(c1050.2,527.07) 1061.25,527.07 v1(1061.25,549.17)
  Bottom Layer w8: v1(1061.25,549.17) cw(c1062.08,549.17) 1062.08,550 P2.4
NetR4_2: R4.2 U1.66 | length 126.3
  Top Layer w8: R4.2 1023.62,582.14 cw(c1044.22,582.14) 1044.22,602.74 ccw(c1044.22,617.57) 1059.05,617.57 U1.66
NetR5_2: R5.2 U1.67 | length 121.8
  Top Layer w8: U1.67 1078.74,617.84 ccw(c1093.84,617.84) 1093.84,602.74 cw(c1093.84,590.28) 1106.3,590.28 R5.2
SCL1: R9.1 U1.23 U3.6 | length 923.3
  Top Layer w8: U3.6 657.26,1607.99 ccw(c700.39,1607.99) 700.39,1564.85 v1(782.46,1564.85) ; R9.1 704.45,1348.13 ccw(c804.45,1348.13) 733.74,1277.42 745.7,1265.46 ccw(c778.13,1297.89) 778.13,1252.03 v1(799.95,1252.03) ; v1@803.15,1252.03 U1.23
  Bottom Layer w8: v1(782.46,1564.85) 828.57,1564.85 cw(c828.57,1534.8) 858.63,1534.8 858.63,1267.3 cw(c843.35,1267.3) 843.35,1252.03 v1(799.95,1252.03)
SDA1: R8.1 U1.22 U3.7 | length 1028.9
  Top Layer w8: R8.1 621.77,1408.18 ccw(c721.77,1408.18) 651.06,1337.47 753.98,1234.56 ccw(c769.94,1250.52) 769.94,1227.95 v1@822.83,1227.95 ; U3.7 696.63,1611.02 ccw(c718.71,1611.02) 718.71,1588.93 v1(806.54,1588.93) ; U1.22 v1@822.83,1227.95 ; v1(825.53,1227.95) v1@822.83,1227.95
  Bottom Layer w8: v1(806.54,1588.93) 828.57,1588.93 cw(c828.57,1534.8) 882.71,1534.8 882.71,1263.06 cw(c847.59,1263.06) 847.59,1227.95 v1(825.53,1227.95)
VA: L1.2 P2.2 | length 1660.3
  Top Layer w20: L1.2 887.21,1494.53 915,1466.74 v1(915,1465) ; v1(920.66,1245.37) v1(1196.22,1245.37) ; v1(1238.59,770.2) v1(1238.59,1203) ; v1(1280.76,602.88) v1(1280.76,728.03)
  Bottom Layer w20: P2.2 900,586.98 cw(c915.9,586.98) 915.9,602.88 v1(1280.76,602.88) ; v1(915,1465) 915,1251.03 v1(920.66,1245.37) ; v1(1196.22,1245.37) v1(1238.59,1203) ; v1(1238.59,770.2) v1(1280.76,728.03)
VDDA1: C1.2 C2.2 R2.1 U1.41 | length 1033.5
  Top Layer w8: C2.2 543.1,1488.46 cw(c562.56,1488.46) 562.56,1507.91 v1(579.44,1507.91)
  Top Layer w10: C2.2 585.99,1331.44 cw(c585.99,1315.31) 602.12,1315.31 v1(602.12,1172.49) ; v1(548.21,1029.28) C1.2 594.73,1029.28 cw(c594.73,1019.08) 604.92,1019.08 604.92,950.36 ccw(c614.34,950.36) 614.34,940.95 U1.41
  Bottom Layer w10: v1(548.21,1029.28) 548.21,1084.19 cw(c631.24,1084.19) 572.53,1142.9 v1(602.12,1172.49) ; v1(579.44,1507.91) 623.45,1507.91 cw(c623.45,1454.35) 661.32,1492.22 ccw(c720.76,1551.66) 720.76,1467.61 768.8,1467.61 ccw(c768.8,1486.33) 787.53,1486.33 v1(787.53,1507.91)
VDDD1: C5.2 C6.2 C7.2 C8.2 C9.2 C10.2 C11.2 C12.1 P1.1 R1.2 R3.2 R8.2 R9.2 R11.2 RN1.7 RN1.8 RN2.6 RN2.7 U1.8 U1.17 U1.31 U1.44 U1.58 U1.82 U2.1 U3.1 | length 6813.5
  Top Layer w8: 717.45,575.07 ccw(c717.45,576.58) 718.96,576.58 718.96,712.63 cw(c747.66,712.63) 747.66,741.33 1239.08,741.33 cw(c1239.08,723.21) 1257.2,723.21 1257.2,587.77 cw(c1236.63,587.77) 1236.63,567.19 R11.2
  Top Layer w10: 482.37,673.9 546.11,673.9 ccw(c546.11,704.36) 576.57,704.36 C10.2 594.25,743.84 ccw(c594.25,758.18) 608.58,758.18 608.58,872.46 cw(c618.02,872.46) 618.02,881.89 U1.44 ; 482.37,1151.38 532.14,1151.38 cw(c532.14,1138.63) 544.9,1138.63 544.9,1123.44 ccw(c556.38,1123.44) 556.38,1111.95 C9.2 576.57,1137.42 cw(c585.66,1137.42) 585.66,1146.51 592.61,1146.51 cw(c592.61,1137.25) 599.16,1143.79 601.85,1141.1 ccw(c609.84,1149.09) 609.84,1137.8 U1.31 ; R8.2 R9.2 ; v1(735.01,1680.94) U3.1 ; C11.2 858.27,596.21 cw(c869.69,596.21) 869.69,607.63 891.69,607.63 ccw(c891.69,617.52) 901.57,617.52 U1.58 ; v1(877.65,1617.68) cw(c873.22,1613.26) 879.49,1613.26 cw(c840.36,1574.13) 895.69,1574.13 895.69,1540.62 ; U1.17 921.26,1388.73 cw(c938.38,1388.73) 938.38,1405.85 1024.88,1405.85 ccw(c1024.88,1416.13) 1035.16,1416.13 C6.2 1004.17,1430.95 cw(c1004.17,1441.25) 993.87,1441.25 993.87,1540.62 ; 950.02,1540.62 cw(c950.02,1538.15) 952.48,1538.15 R1.2 ; P1.1 964.9,1859.9 ccw(c982.87,1859.9) 970.16,1847.19 977.89,1839.46 cw(c965.04,1826.62) 983.21,1826.62 C12.1 1010.5,1806.34 cw(c1010.5,1794.03) 1022.81,1794.03 1022.81,1667.87 ; 1022.81,1540.62 1022.81,1667.87 ; U1.8 1098.43,1382.55 cw(c1114.32,1382.55) 1103.08,1393.78 1112.81,1403.51 ccw(c1100.66,1415.66) 1117.84,1415.66 C7.2 1148.83,1430.95 ccw(c1148.83,1441.25) 1159.13,1441.25 1159.13,1540.62 ; RN1.7 1122.98,1667.87 ; RN1.8 1158.41,1667.87 ; RN2.6 1256.83,1667.87 ; RN2.7 1288.33,1683.97 cw(c1272.24,1683.97) 1272.24,1667.87 1256.83,1667.87 ; U1.82 1392.54,881.89 cw(c1392.54,856.65) 1410.38,874.5 1420.37,864.52 ccw(c1435.45,879.6) 1435.45,858.27 C8.2 ; R3.2 1519.02,1000 ; 1475.37,1464.46 1478.34,1464.46 ; 1022.81,1667.87 1122.98,1667.87 ; 1122.98,1667.87 1158.41,1667.87 ; 1158.41,1667.87 1256.83,1667.87
  Top Layer w15: 477.92,673.9 477.92,1364.43 cw(c506.85,1364.43) 486.39,1384.89 v1(507.24,1405.74) ; 478.12,673.9 478.12,635.19 ccw(c538.24,635.19) 538.24,575.07 717.45,575.07 C11.2 ; 478.41,818.61 U2.1 ; v1(574.06,1472.56) cw(c616.17,1430.45) 616.17,1490 R8.2 ; v1(822.11,1540.62) 895.69,1540.62 950.02,1540.62 993.87,1540.62 1022.81,1540.62 1159.13,1540.62 1323.46,1540.62 cw(c1323.46,1345.05) 1478.34,1464.46 cw(c1323.46,1345.05) 1519.02,1345.05 1519.02,1000.03 ; C8.2 1504.28,858.27 ccw(c1504.28,873.01) 1519.02,873.01 1519.02,1000
  Top Layer w18: C5.2 1475.33,1464.41
  Bottom Layer w10: v1(704.85,1505.95) 704.85,1522.83 cw(c722.63,1522.83) 722.63,1540.62 v1(822.11,1540.62) ; v1(735.01,1680.94) 735.01,1652.91 ccw(c770.24,1652.91) 770.24,1617.68 v1(877.65,1617.68)
  Bottom Layer w15: v1(507.24,1405.74) v1(574.06,1472.56) ; v1@821.28,1539.78 cw(c822.11,1539.78) v1(822.11,1540.62)
pads on no net: U1.1 U1.2 U1.3 U1.4 U1.5 U1.6 U1.7 U1.9 U1.10 U1.11 U1.12 U1.13 U1.14 U1.15 U1.18 U1.19 U1.20 U1.21 U1.24 U1.26 U1.27 U1.28 U1.29 U1.30 U1.33 U1.34 U1.35 U1.37 U1.38 U1.39 U1.40 U1.42 U1.45 U1.46 U1.47 U1.48 U1.49 U1.50 U1.51 U1.52 U1.53 U1.54 U1.55 U1.56 U1.57 U1.61 U1.62 U1.63 U1.64 U1.65 U1.68 U1.69 U1.70 U1.71 U1.72 U1.73 U1.74 U1.75 U1.79 U1.80 U1.81 U1.84 U1.85 U1.86 U1.87 U1.88 U1.89 U1.90 U1.91 U1.92 U1.93 U1.94 U1.95 U1.96 U1.97 U1.98 U1.99 U3.2

## Polygon pours and split planes (outlines as drawn)
GND on Bottom Layer "Bottom Layer-GND" (solid, remove dead copper, pour order 0): 404.16,2110.22 404.16,385.22 1584.16,385.22 1584.16,2110.22

## Keep-outs
Keep-Out Layer:
  the board outline again, w10

## Other copper
Bottom Layer:
  pour cut-out: 836.31,550 836.31,503 ccw(c869.45,503) 869.45,469.86 796.25,469.86 ccw(c796.25,453.39) 779.78,453.39
  pour cut-out: 1438.48,1884.26 1438.48,2005.79 ccw(c1422.43,2005.79) 1422.43,2021.84 1478.63,2021.84 cw(c1478.63,1921.84) 1578.63,1921.84 1578.63,1897.14

## Silkscreen, mask and mechanical layers (free items; w line width, h text height)
Top Overlay:
  drawing of 1868 lines, arcs and shapes, not listed
  text "EFM32 TEST BOARD" at 1003.56,1654.04 h50
  text "05/14/2018 V1.0 REV 212" at 1003.32,1614.47 h40
  text "S. Damkjar" at 1002.23,1575.63 h40
Bottom Overlay:
  rectangle: 625,875 1375,1375
  text "3V3" at 819.47,618.04 h60 r90
  text "VDUT" at 919.47,618.04 h60 r90
  text "TXS" at 1019.47,618.04 h60 r90
  text "RXS" at 1119.47,618.04 h60 r90
  text "GND" at 1219.47,618.04 h60 r90